# Altium PCB Aeroval-v2-PCB1-proto1.PcbDoc (part 2 of 2)
Units mm, origin at the board's own origin, x right, y up, seen from the top; angles counter-clockwise.
Board outline 100 x 100 mm, 6 copper layers (Top Layer, Internal Plane (GND), Signal Layer (VERT), Signal Layer 2 (HOR), Internal Plane (PWR), Bottom Layer), stack 1.231 mm thick; 208 components, 166 nets, 796 pads, 481 vias.
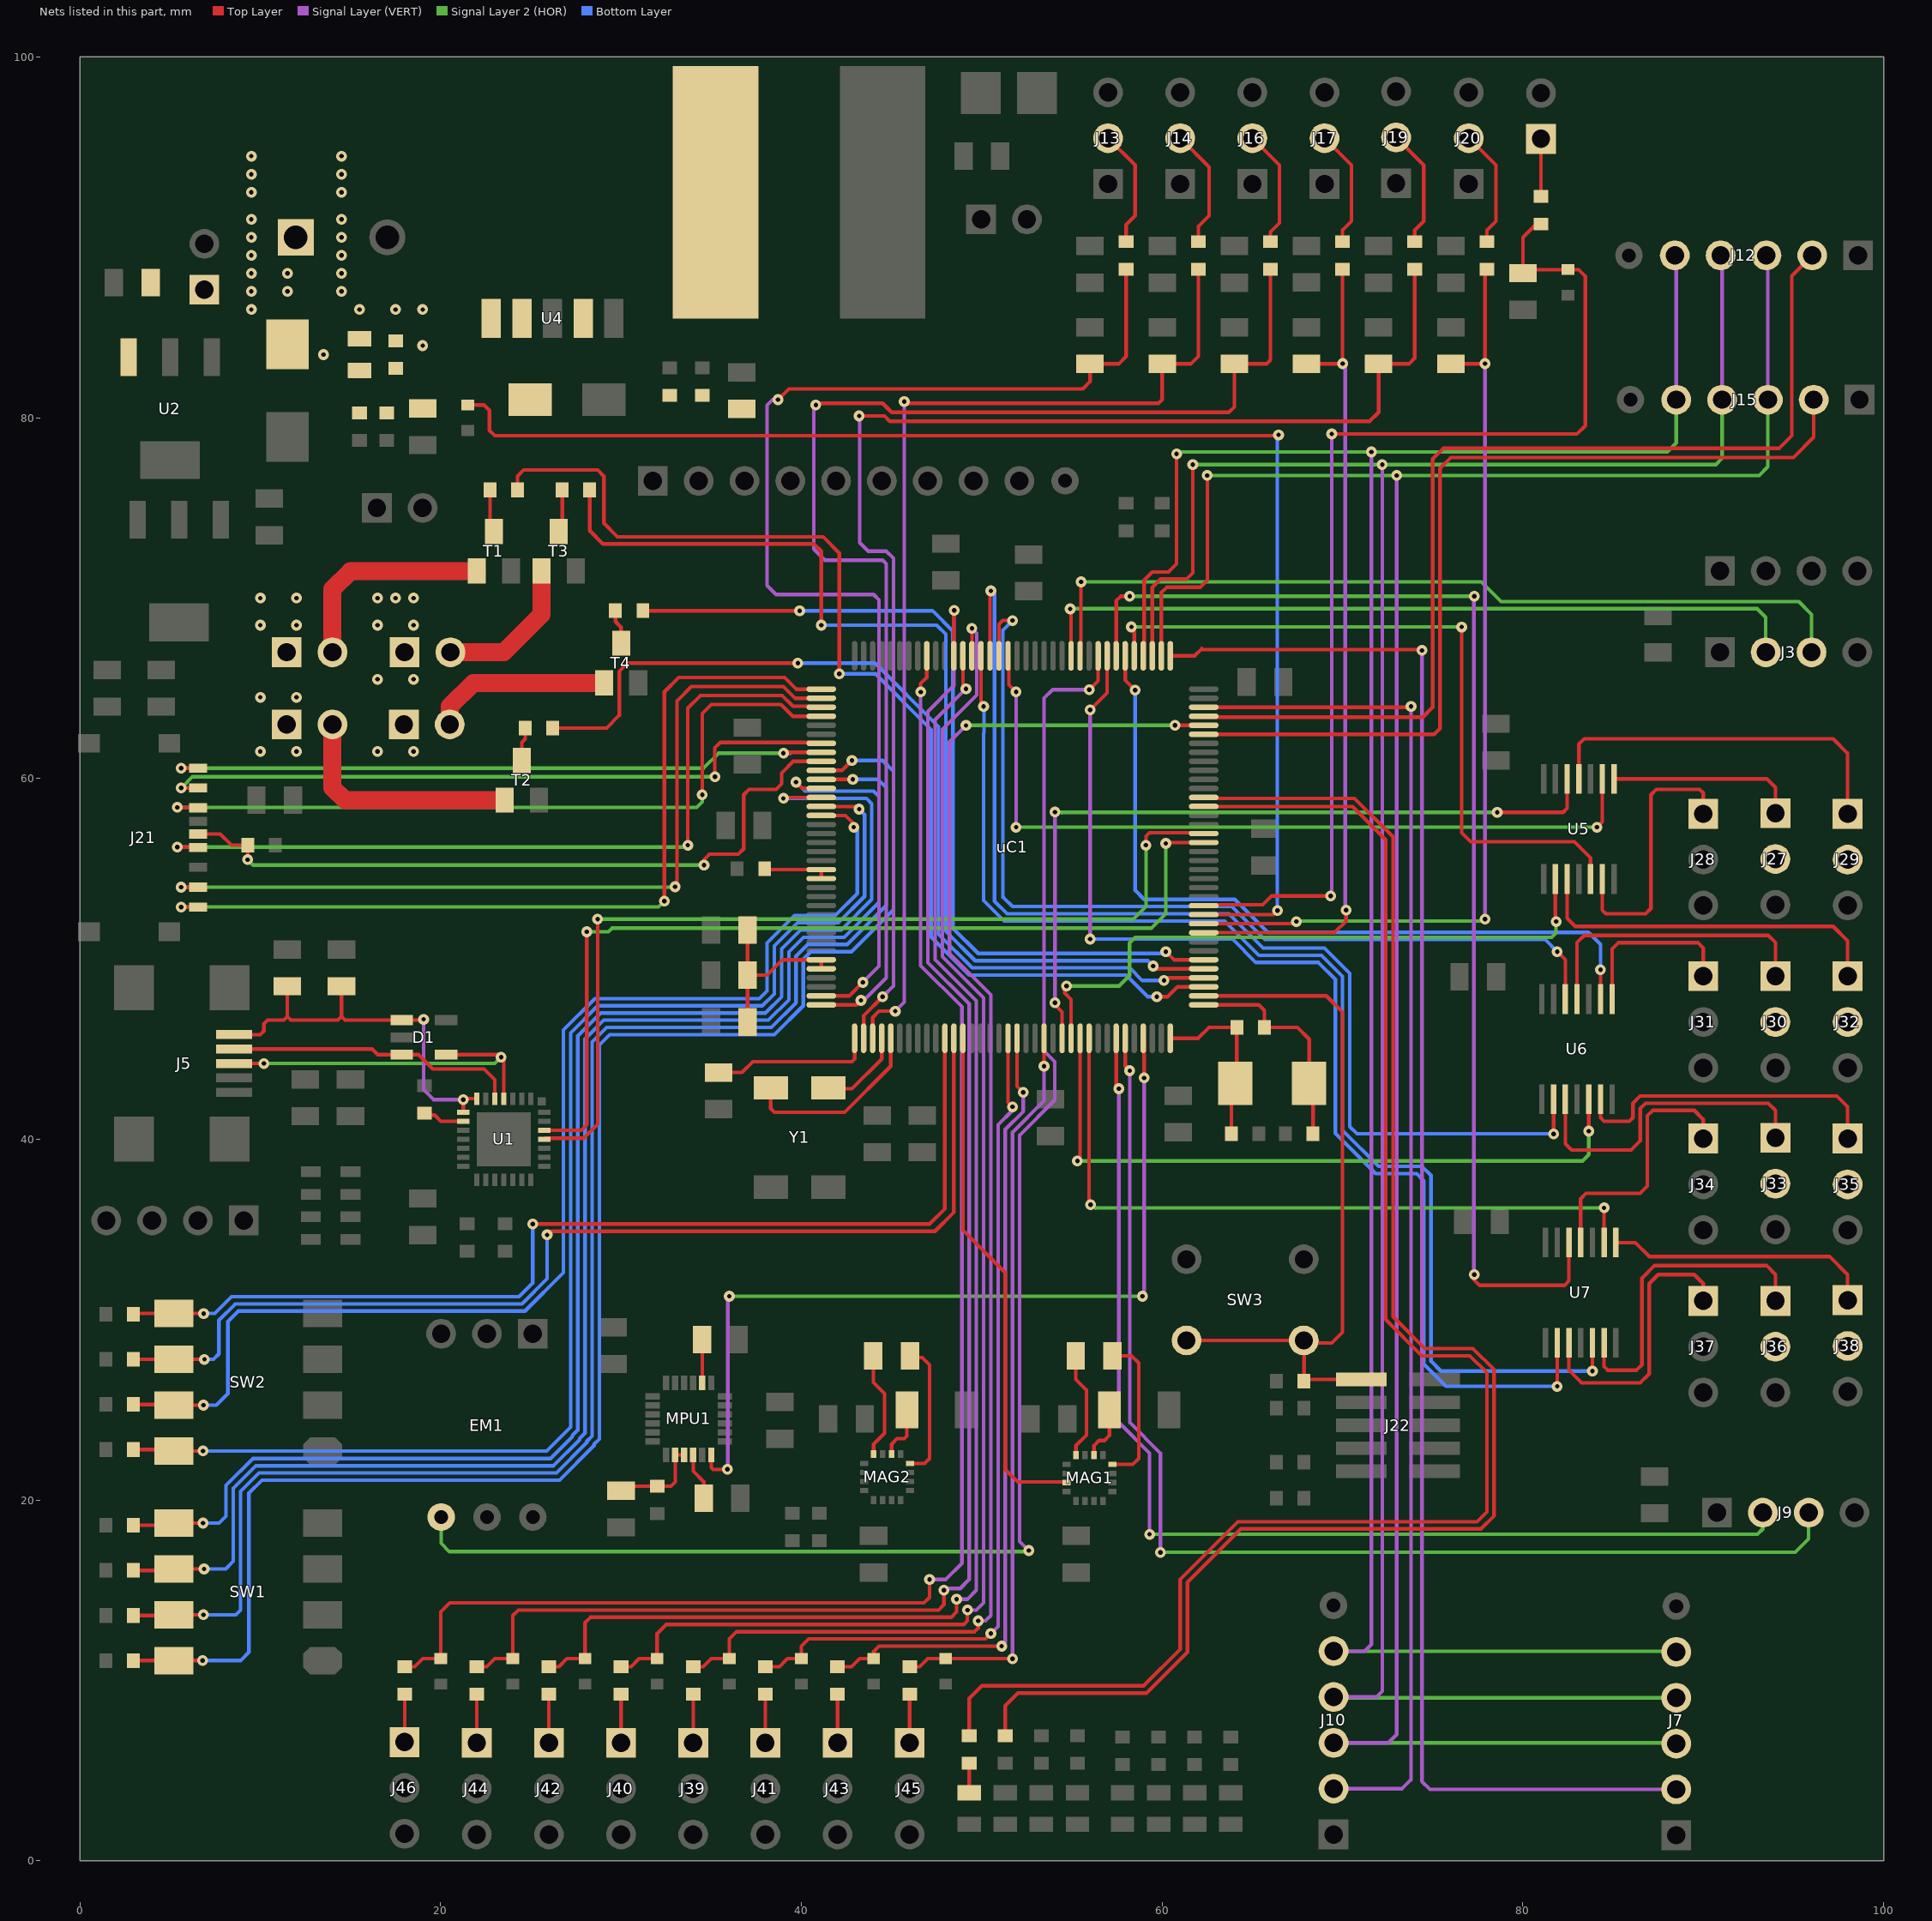
[diagram p6: the nets of this part, all layers, seen from the top]

## Via types
v1: diameter 0.6, hole 0.25, Top Layer to Bottom Layer, 475 vias
v2: diameter 6, hole 3, Top Layer to Bottom Layer, 4 vias
v3: diameter 1.2, hole 0.9, Top Layer to Bottom Layer, 2 vias

## Nets (pads, with @x,y where several pads share a name; then routed paths per layer and width w, separated by ;. In a path a pad name is that pad's centre, name@x,y a point inside that pad or via, vN(x,y) a via of type N, cw(c..) or ccw(c..) an arc to the next point about the centre after c; other vN are vias at no path point) (continued)
LED6_UC: R18.1 uC1.96 | length 88.3
  Top Layer w0.2: R18.1@51.3,6.924 51.3,8.6 52,9.3 59.137,9.3 61.4,11.563 61.4,15.434 64.366,18.4 77.666,18.4 78.4,19.134 78.4,27.224 77.224,28.4 74.566,28.4 72.8,30.166 72.8,56.766 70.666,58.9 62.35,58.9 uC1.96@62.3,58.95
LED7: D9.A R25.2 | length 1.6
  Top Layer w0.2: D9.A@49.3,3.775 R25.2@49.3,5.4
LED7_UC: R25.1 uC1.95 | length 89.3
  Top Layer w0.2: R25.1@49.3,6.924 49.3,9 50,9.7 58.972,9.7 61,11.728 61,15.6 64.2,18.8 77.464,18.8 78,19.336 78,27.059 77.059,28 74.4,28 72.4,30 72.4,56.6 70.55,58.45 uC1.95@62.3,58.45
NetC25_2: C25.2 R36.2 R37.1 U4.4
NetC33_1: C33.1 MPU1.8 MPU1.9 R64.1 | length 5.2
  Top Layer w0.2: C33.1@30,20.516 30.246,20.762 R64.1@32,20.762 32.762,20.762 33,21 MPU1.8@33,22.5 MPU1.9@33.5,22.5
NetC34_1: C34.1 MPU1.10 | length 2.6
  Top Layer w0.2: MPU1.10@34,22.5 34,21.6 34.584,21.016 C34.1@34.584,20.1
NetC35_1: C35.1 MPU1.20 | length 2.4
  Top Layer w0.2: C35.1@34.484,28.9 34.5,28.884 MPU1.20@34.5,26.5
NetC40_1: C40.1 MAG1.10 | length 3
  Top Layer w0.2: MAG1.10@56.222,22.5 56.222,23.022 56.5,23.3 56.8,23.3 57.071,23.571 C40.1@57.071,25
NetC42_1: C42.1 MAG1.12 | length 6
  Top Layer w0.2: C42.1@55.206,28 55.206,26.694 55.8,26.1 55.8,23.6 55.222,23.022 MAG1.12@55.222,22.5
NetC42_2: C42.2 MAG1.8 | length 8.5
  Top Layer w0.2: C42.2@57.238,28 58.3,28 58.7,27.6 58.7,22.3 58.375,21.975 MAG1.8@57.247,21.975
NetC44_1: C44.1 MAG2.10 | length 3
  Top Layer w0.2: MAG2.10@45,22.55 45,23.1 45.3,23.4 45.7,23.4 45.849,23.549 C44.1@45.849,25
NetC46_1: C46.1 MAG2.12 | length 6
  Top Layer w0.2: C46.1@43.984,28 43.984,26.516 44.6,25.9 44.6,23.7 44,23.1 MAG2.12@44,22.55
NetC46_2: C46.2 MAG2.8 | length 7.7
  Top Layer w0.2: C46.2@46.016,28 46.116,27.9 46.7,27.9 47.1,27.5 47.1,22.3 46.825,22.025 MAG2.8@46.025,22.025
NetC57_2: C57.2 C58.1 FB1.1 uC1.31 uC1.32 | length 10.1
  Top Layer w0.2: C58.1@37.016,46.5 C57.2@37.016,49.1 ; FB1.1@37.066,51.55 FB1.1@37.016,51.6 C57.2@37.016,49.1 ; uC1.32@41.1,49.45 uC1.31@41.1,49.95 38.95,49.95 38.1,49.1 C57.2@37.016,49.1
NetC59_1: C59.1 uC1.37 | length 9
  Top Layer w0.2: C59.1@35.4,43.7 36.7,43.7 37.3,44.3 42.8,44.3 42.95,44.45 uC1.37@42.95,45.6
NetC60_2: C60.2 R67.1 uC1.73 Y2.1 | length 12.5
  Top Layer w0.2: uC1.73@62.3,47.45 65.35,47.45 65.662,47.138 R67.1@65.662,46.2 67.5,46.2 68.15,45.55 68.15,43.3 68.362,43.088 C60.2@68.362,40.3
NetC61_2: C61.2 R67.2 uC1.72 Y2.2 | length 10
  Top Layer w0.2: uC1.72@60.45,45.6 61.994,45.6 62.594,46.2 R67.2@64.138,46.2 64.138,43.188 Y2.2@64.05,43.1 63.838,42.888 C61.2@63.838,40.3
NetD10_C: D10.C R34.2
NetD12_1: D12.1 L1.1 U4.2
NetD13_2: D13.2 R38.1 uC1.104 | length 82.5
  Top Layer w0.2: R38.1@34,10.762 34.552,10.762 35,11.21 D13.2@36,11.21 36,12.3 36.4,12.7 49.6,12.7 49.8,12.9 v1(49.8,13.3) ; v1(60.715,62.95) uC1.104@62.3,62.95
  Signal Layer (VERT) w0.2: v1(49.124,62.941) 48.209,62.027 48.209,50.291 50.5,48 50.5,25.943 50.5,23.057 50.5,13.6 50.2,13.3 v1(49.8,13.3)
  Signal Layer 2 (HOR) w0.2: v1(49.124,62.941) 49.132,62.95 v1(60.715,62.95)
  Bottom Layer w0.2: v1@49.022,62.941 v1(49.124,62.941)
NetD14_2: D14.2 R39.1 uC1.54 | length 47.3
  Top Layer w0.2: R39.1@38,10.762 38.776,10.762 39.224,11.21 D14.2@40,11.21 40,11.9 40.4,12.3 50.2,12.3 v1(50.5,12.6) ; uC1.54@51.45,45.6 51.45,42.05 v1(51.7,41.8)
  Signal Layer (VERT) w0.2: v1(50.5,12.6) 50.9,13 50.9,23.223 50.9,25.777 50.9,40.8 51.7,41.6 v1(51.7,41.8)
NetD15_2: D15.2 R40.1 uC1.55 | length 44.1
  Top Layer w0.2: R40.1@42,10.762 42.776,10.762 43.224,11.21 D15.2@44,11.21 44,11.6 44.3,11.9 v1(51.1,11.9) ; uC1.55@51.95,45.6 51.95,42.95 v1(52.3,42.6)
  Signal Layer (VERT) w0.2: v1(51.1,11.9) 51.3,12.1 51.3,40.3 51.3,40.551 52.3,41.551 v1(52.3,42.6)
NetD16_2: D16.2 R41.1 uC1.58 | length 41.1
  Top Layer w0.2: R41.1@46,10.762 46.552,10.762 47,11.21 D16.2@48,11.21 51.69,11.21 v1(51.7,11.2) ; v1(53.45,44.05) uC1.58@53.45,45.6 uC1.58@53.5,45.55
  Signal Layer (VERT) w0.2: v1(51.7,11.2) 51.7,11.8 51.7,40 51.7,40.386 53.45,42.136 v1(53.45,44.05)
NetD17_2: D17.2 R42.1 uC1.131 | length 80.1
  Top Layer w0.2: R42.1@30,10.762 30.552,10.762 31,11.21 D17.2@32,11.21 32,12.6 32.5,13.1 49,13.1 49.2,13.3 v1(49.2,13.9) ; uC1.131@49.45,66.8 v1(49.45,68.322)
  Signal Layer (VERT) w0.2: v1(49.2,13.9) 49.7,13.9 50.1,14.3 50.1,22.892 50.1,26.108 50.1,47.834 47.809,50.125 47.809,62.719 49.724,64.633 49.724,68.049 v1(49.45,68.322)
NetD18_2: D18.2 R43.1 uC1.132 | length 80.6
  Top Layer w0.2: R43.1@26,10.762 26.552,10.762 27,11.21 D18.2@28,11.21 28,13.2 28.3,13.5 48.3,13.5 48.6,13.8 v1(48.6,14.5) ; uC1.132@48.95,66.8 48.95,65.121 49.098,64.973 v1(49.124,64.973)
  Signal Layer (VERT) w0.2: v1(48.6,14.5) 49.2,14.5 49.7,15 49.7,22.726 49.7,26.274 49.7,47.669 47.409,49.96 47.409,63.259 v1(49.124,64.973)
NetD19_2: D19.2 R44.1 uC1.133 | length 89
  Top Layer w0.2: R44.1@22,10.762 22.552,10.762 23,11.21 D19.2@24,11.21 24,13.6 24.3,13.9 47.6,13.9 47.9,14.2 v1(47.9,15) ; uC1.133@48.45,66.8 48.45,69.303 v1(48.463,69.317)
  Signal Layer (VERT) w0.2: v1(47.9,15) 48,15.1 48.8,15.1 49.3,15.6 49.3,47.503 47.009,49.794 47.009,63.709 48.463,65.163 v1(48.463,69.317) v1@48.412,69.266
NetD20_2: D20.2 R45.1 uC1.136 | length 86.8
  Top Layer w0.2: R45.1@18,10.762 18.552,10.762 19,11.21 D20.2@20,11.21 20,13.8 20.5,14.3 46.8,14.3 47.1,14.6 v1(47.1,15.6) ; v1(46.609,64.795) 46.609,65.258 46.95,65.599 uC1.136@46.95,66.8
  Signal Layer (VERT) w0.2: v1(46.609,64.795) 46.609,49.628 48.9,47.337 48.9,16.5 48,15.6 v1(47.1,15.6)
NetEM1_4: EM1.4 uC1.117 | length 87.5
  Top Layer w0.2: v1(55.956,64.922) 56.45,65.416 uC1.117@56.45,66.8
  Signal Layer (VERT) w0.2: v1(52.6,17.2) 52.1,17.7 52.1,40.22 54.05,42.17 54.05,44.299 53.451,44.897 53.451,64.451 53.922,64.922 v1(55.956,64.922)
  Signal Layer 2 (HOR) w0.2: EM1.4@20.025,19.057 20.025,17.6 20.487,17.138 52.538,17.138 v1(52.6,17.2)
NetJ27_1: J27.1 U5.8 | length 10.6
  Top Layer w0.2: U5.8@85.05,59.975 93.525,59.975 94,59.5 J27.1@94,58.08
NetJ28_1: J28.1 U5.6 | length 15.2
  Top Layer w0.2: U5.6@84.4,54.425 84.4,52.7 84.6,52.5 86.8,52.5 87.1,52.8 87.1,59.1 87.4,59.4 89.8,59.4 90,59.2 J28.1@90,58.04
NetJ29_1: J29.1 U5.11 | length 20.6
  Top Layer w0.2: U5.11@83.1,59.975 83.1,61.9 83.4,62.2 97.2,62.2 98,61.4 J29.1@98,58.04
NetJ30_1: J30.1 U6.11 | length 16.3
  Top Layer w0.2: U6.11@83,47.775 83,50.9 83.4,51.3 93.6,51.3 94,50.9 J30.1@94,49.04
NetJ31_1: J31.1 U6.8 | length 9.7
  Top Layer w0.2: U6.8@84.95,47.775 84.95,50.55 85.3,50.9 89.7,50.9 90,50.6 J31.1@90,49.04
NetJ32_1: J32.1 U5.3 | length 20.2
  Top Layer w0.2: U5.3@82.45,54.425 82.45,52.25 82.9,51.8 97.2,51.8 98,51 J32.1@98,49.04
NetJ33_1: J33.1 U6.3 | length 18.1
  Top Layer w0.2: U6.3@82.35,42.225 82.35,39.75 82.7,39.4 86,39.4 86.5,39.9 86.5,41.7 86.8,42 93.6,42 94,41.6 J33.1@94,40.08
NetJ34_1: J34.1 U7.11 | length 14.8
  Top Layer w0.2: U7.11@83.2,34.275 83.2,36.7 83.5,37 86.5,37 86.9,37.4 86.9,41.3 87.2,41.6 89.5,41.6 90,41.1 J34.1@90,40.04
NetJ35_1: J35.1 U6.6 | length 17.9
  Top Layer w0.2: U6.6@84.3,42.225 84.3,41.2 84.5,41 85.9,41 86.1,41.2 86.1,42 86.5,42.4 97.4,42.4 98,41.8 J35.1@98,40.04
NetJ36_1: J36.1 U7.6 | length 17.8
  Top Layer w0.2: U7.6@84.5,28.725 84.5,27.4 84.7,27.2 86.3,27.2 86.6,27.5 86.6,32.3 87.3,33 93.5,33 94,32.5 J36.1@94,31.04
NetJ37_1: J37.1 U7.3 | length 15.8
  Top Layer w0.2: U7.3@82.55,28.725 82.55,27.2 83.25,26.5 86.5,26.5 87,27 87,32 87.5,32.5 89.5,32.5 90,32 J37.1@90,31.04
NetJ38_1: J38.1 U7.8 | length 15
  Top Layer w0.2: U7.8@85.15,34.275 86.225,34.275 87,33.5 97,33.5 98,32.5 J38.1@98,31.08
NetJ39_1: J39.1 R38.2 | length 2.7
  Top Layer w0.2: J39.1@34,6.54 R38.2@34,9.238
NetJ40_1: J40.1 R42.2 | length 2.7
  Top Layer w0.2: J40.1@30,6.54 R42.2@30,9.238
NetJ41_1: J41.1 R39.2 | length 2.7
  Top Layer w0.2: J41.1@38,6.54 R39.2@38,9.238
NetJ42_1: J42.1 R43.2 | length 2.7
  Top Layer w0.2: J42.1@26,6.54 R43.2@26,9.238
NetJ43_1: J43.1 R40.2 | length 2.7
  Top Layer w0.2: J43.1@42,6.54 R40.2@42,9.238
NetJ44_1: J44.1 R44.2 | length 2.7
  Top Layer w0.2: J44.1@22,6.54 R44.2@22,9.238
NetJ45_1: J45.1 R41.2 | length 2.7
  Top Layer w0.2: J45.1@46,6.54 R41.2@46,9.238
NetJ46_1: J46.1 R45.2 | length 2.7
  Top Layer w0.2: J46.1@18,6.58 R45.2@18,9.238
NetJ47_1: J47.1 R65.1 | length 3.2
  Top Layer w0.2: R65.1@81,92.262 J47.1@81,95.46
NetMAG1_15: MAG1.15 uC1.49 | length 28.6
  Top Layer w0.2: uC1.49@48.95,45.6 48.95,34.95 51.3,32.6 51.3,21.7 52,21 54.697,21 MAG1.15@54.697,20.975
NetMPU1_12: MPU1.12 uC1.69 | length 48.5
  Top Layer w0.2: MPU1.12@35,22.5 35,21.8 35.1,21.7 v1(35.9,21.7) ; uC1.69@58.95,45.6 59,45.55 v1(59,43.4)
  Signal Layer (VERT) w0.2: v1(35.9,21.7) 35.916,21.716 35.916,31.216 v1(36,31.3) ; v1(58.9,31.3) 59,31.4 v1(59,43.4)
  Signal Layer 2 (HOR) w0.2: v1(36,31.3) v1(58.9,31.3)
NetR1_1: R1.1 uC1.75 | length 63.8
  Top Layer w0.2: R1.1@24.262,76 24.262,76.762 24.6,77.1 28.7,77.1 29.05,76.75 29.05,74.15 29.8,73.4 41.2,73.4 42.1,72.5 42.1,65.6 v1(42.1,65.8) ; v1(59.7,47.9) 60.3,47.9 60.85,48.45 uC1.75@62.3,48.45
  Bottom Layer w0.2: v1(42.1,65.8) 44.105,65.8 47.2,62.705 47.2,51.203 49.303,49.1 58,49.1 59.2,47.9 v1(59.7,47.9)
NetR2_1: R2.1 U1.9 | length 2.4
  Top Layer w0.2: R2.1@19,41.338 19.662,41.338 20,41 U1.9@21.25,41
NetR3_1: R3.1 uC1.76 | length 53.1
  Top Layer w0.2: R3.1@26.212,62.8 29.2,62.8 29.9,63.5 29.9,65.924 30.376,66.4 v1(39.8,66.4) ; v1(60.1,48.8) 60.25,48.95 uC1.76@62.3,48.95
  Bottom Layer w0.2: v1(39.8,66.4) 44.071,66.4 47.6,62.871 47.6,51.369 49.469,49.5 58.2,49.5 58.9,48.8 v1(60.1,48.8)
NetR4_1: R4.1 uC1.77 | length 58.4
  Top Layer w0.2: R4.1@28.262,76 28.262,73.738 29,73 40.7,73 41.1,72.6 v1(41.1,68.5) ; v1(59.5,49.6) 59.65,49.45 uC1.77@62.3,49.45
  Bottom Layer w0.2: v1(41.1,68.5) 47.495,68.5 48,67.995 48,51.534 49.634,49.9 59.2,49.9 v1(59.5,49.6)
NetR5_1: R5.1 uC1.78 | length 48.8
  Top Layer w0.2: R5.1@31.212,69.3 v1(39.9,69.3) ; v1(60.2,50.4) 60.65,49.95 uC1.78@62.3,49.95
  Bottom Layer w0.2: v1(39.9,69.3) 47.261,69.3 48.4,68.161 48.4,51.7 49.8,50.3 60.1,50.3 v1(60.2,50.4)
NetR66_2: R66.2 uC1.21 uC1.22 | length 3.7
  Top Layer w0.2: R66.2@37.962,55 38.012,54.95 uC1.21@41.1,54.95 uC1.22@41.1,54.45
NetuC1_40: uC1.40 Y1.4 | length 4.8
  Top Layer w0.2: Y1.4@41.5,42.85 41.55,42.8 42.8,42.8 44.45,44.45 uC1.40@44.45,45.6
NetuC1_41: uC1.41 Y1.1 | length 10.9
  Top Layer w0.2: Y1.1@38.2,43.15 38.4,42.95 Y1.1@38.3,42.85 38.3,41.7 38.5,41.5 42.4,41.5 44.95,44.05 uC1.41@44.95,45.6
PWM_O_0_UC: U5.9 uC1.127 | length 44.7
  Top Layer w0.2: uC1.127@51.45,66.8 51.5,66.75 51.5,65.2 v1(51.9,64.8) ; v1(84.1,57.3) 84.4,57.6 U5.9@84.4,59.975
  Signal Layer (VERT) w0.2: v1(51.9,57.3) v1(51.9,64.8)
  Signal Layer 2 (HOR) w0.2: v1(51.9,57.3) v1(84.1,57.3)
PWM_O_1_UC: U6.12 uC1.128 | length 53
  Top Layer w0.2: uC1.128@50.95,66.8 50.95,68.55 51.156,68.756 v1(51.7,68.756) ; v1(81.9,50.4) 82.35,49.95 U6.12@82.35,47.775
  Bottom Layer w0.2: v1(51.7,68.756) 51.166,68.222 51.166,53.4 51.2,53.4 51.7,52.9 63.866,52.9 65.696,51.07 81.23,51.07 v1(81.9,50.4)
PWM_O_2_UC: U6.2 uC1.129 | length 64.2
  Top Layer w0.2: uC1.129@50.45,66.8 50.45,70.35 v1(50.5,70.4) ; v1(81.7,40.3) U6.2@81.7,42.225
  Bottom Layer w0.2: v1(50.5,70.4) 50.7,70.2 50.7,53.2 51.4,52.5 63.7,52.5 65.6,50.6 69,50.6 70.4,49.2 70.4,40.7 70.8,40.3 v1(81.7,40.3)
PWM_O_3_UC: U7.5 uC1.130 | length 70.9
  Top Layer w0.2: uC1.130@49.95,66.8 49.95,64.15 v1(50.1,64) ; v1(83.85,27.15) U7.5@83.85,28.725
  Signal Layer (VERT) w0.2: v1@50,64 v1(50.1,64)
  Bottom Layer w0.2: v1(50.1,64) 50.124,63.976 50.124,62.527 50.1,62.503 50.1,53.234 51.234,52.1 63.466,52.1 65.366,50.2 68.834,50.2 70,49.034 70,40.5 72,38.5 74.4,38.5 74.9,38 74.9,27.7 75.45,27.15 v1(83.85,27.15)
PWM_O_4_UC: U5.5 uC1.113 | length 40.3
  Top Layer w0.2: v1(58.293,68.402) 58.293,68.351 58.45,68.194 uC1.113@58.45,66.8 ; v1(76.6,68.4) 76.6,56.99 77.1,56.49 82.855,56.49 83.75,55.594 U5.5@83.75,54.425
  Signal Layer 2 (HOR) w0.2: v1(58.293,68.402) v1@76.6,68.402
PWM_O_5_UC: U6.9 uC1.114 | length 43.3
  Top Layer w0.2: uC1.114@57.95,66.8 57.95,65.45 v1(58.5,64.9) ; U6.9@84.3,47.775 v1(84.3,49.4)
  Bottom Layer w0.2: v1(58.5,64.9) 58.5,53.8 59,53.3 64.031,53.3 65.861,51.47 83.63,51.47 84.3,50.8 v1(84.3,49.4)
PWM_O_6_UC: U7.12 uC1.115 | length 69.1
  Top Layer w0.2: uC1.115@57.45,66.8 57.45,69.85 57.7,70.1 v1(58.2,70.1) ; v1(77.3,32.5) 77.3,32.2 77.6,31.9 82.3,31.9 82.55,32.15 U7.12@82.55,34.275
  Signal Layer (VERT) w0.2: v1(77.3,32.5) 77.284,32.516 77.284,70.084 v1(77.3,70.1)
  Signal Layer 2 (HOR) w0.2: v1(58.2,70.1) 57.9,70.1 v1(77.3,70.1)
PWM_O_7_UC: U7.2 uC1.116 | length 65.4
  Top Layer w0.2: v1(56,63.8) 56.95,64.75 uC1.116@56.95,66.8 ; v1(81.9,26.3) U7.2@81.9,28.725
  Signal Layer (VERT) w0.2: v1@56,51.3 v1(56,63.8)
  Bottom Layer w0.2: v1(56,51.1) 63.9,51.1 65.2,49.8 68.669,49.8 69.6,48.869 69.6,40.334 71.834,38.1 74.1,38.1 74.5,37.7 74.5,27.534 75.734,26.3 v1(81.9,26.3)
PWM_O_8_UC: U5.12 uC1.60 | length 42.9
  Top Layer w0.2: v1(54.051,47.574) 54.051,47.457 54.45,47.059 uC1.60@54.45,45.6 ; v1(78.577,58.123) 82.223,58.123 82.45,58.35 U5.12@82.45,59.975
  Signal Layer (VERT) w0.2: v1(54.051,47.574) v1(54.051,58.141)
  Signal Layer 2 (HOR) w0.2: v1(54.051,58.141) 54.381,58.141 54.422,58.1 54.445,58.123 v1(78.577,58.123)
PWM_O_9_UC: U5.2 uC1.61 | length 35.5
  Top Layer w0.2: v1(54.7,48.5) 54.6,48.4 54.6,48.1 54.95,47.75 uC1.61@54.95,45.6 ; U5.2@81.8,54.425 81.8,52.109 v1(81.839,52.07)
  Signal Layer 2 (HOR) w0.2: v1(54.7,48.5) 57.619,48.5 58.191,49.073 58.191,50.891 58.5,51.2 81.6,51.2 81.839,51.439 v1(81.839,52.07)
PWM_O_10_UC: U6.5 uC1.62 | length 38.6
  Top Layer w0.2: v1(55.3,38.8) 55.45,38.95 uC1.62@55.45,45.6 ; v1(83.65,40.45) U6.5@83.65,42.225
  Signal Layer (VERT) w0.2: v1@55.3,38.6 v1(55.3,38.8)
  Signal Layer 2 (HOR) w0.2: v1(55.3,38.8) 83.3,38.8 83.65,39.15 v1(83.65,40.45)
PWM_O_11_UC: U7.9 uC1.63 | length 39.9
  Top Layer w0.2: uC1.63@55.95,45.6 55.95,36.45 v1(56.025,36.375) ; U7.9@84.5,34.275 v1(84.5,36.2)
  Signal Layer 2 (HOR) w0.2: v1(56.025,36.375) 56.025,36.475 56.316,36.184 56.332,36.2 78.451,36.2 78.467,36.184 78.965,36.184 78.981,36.2 v1(84.5,36.2)
RESET_B: J22.10 R29.1 SW3.A uC1.74 | length 40.2
  Top Layer w0.2: SW3.A@61.35,28.85 SW3.A@67.85,28.85 67.862,28.838 SW3.A@67.862,28.7 ; uC1.74@62.3,47.95 69.1,47.95 70,47.05 70,29.3 69.4,28.7 SW3.A@67.862,28.7 ; J22.10@71.036,26.68 67.942,26.68 R29.1@67.862,26.6 SW3.A@67.862,28.7
S0: J13.2 R9.1 | length 6.6
  Top Layer w0.2: J13.2@57,95.5 58.5,94 58.5,91.2 58,90.7 R9.1@58,89.762
S0_UC: C7.1 R9.2 uC1.35 | length 67.1
  Top Layer w0.2: v1(38.7,81) 39.3,81.6 55.6,81.6 56,82 C7.1@56,82.984 57.584,82.984 58,83.4 R9.2@58,88.238 ; uC1.35@41.1,47.95 42.65,47.95 v1(43.4,48.7)
  Signal Layer (VERT) w0.2: v1(38.7,81) 38.4,81 38.1,80.7 38.1,70.7 38.6,70.2 44,70.2 44.3,69.9 44.3,49.6 v1(43.4,48.7)
S1: J16.2 R19.1 | length 6.6
  Top Layer w0.2: J16.2@65,95.5 66.5,94 66.5,90.8 66,90.3 R19.1@66,89.762
S1_UC: C11.1 R19.2 uC1.36 | length 72.6
  Top Layer w0.2: v1(40.8,80.7) 40.9,80.8 44.5,80.8 45,80.3 63.7,80.3 64,80.6 C11.1@64,82.984 65.784,82.984 66,83.2 R19.2@66,88.238 ; uC1.36@41.1,47.45 43.05,47.45 v1(43.3,47.7)
  Signal Layer (VERT) w0.2: v1(40.8,80.7) 40.683,80.583 40.683,72.717 41.3,72.1 44.5,72.1 44.7,71.9 44.7,48.949 43.451,47.7 v1(43.3,47.7)
S2: J19.2 R26.1 | length 6.6
  Top Layer w0.2: J19.2@72.968,95.54 74.5,94.008 74.5,90.9 74,90.4 R26.1@74,89.762
S2_UC: C16.1 R26.2 uC1.38 | length 75.4
  Top Layer w0.2: v1(43.2,80.1) 44.6,80.1 44.9,79.8 71.5,79.8 72,80.3 C16.1@72,82.984 73.684,82.984 74,83.3 R26.2@74,88.238 ; uC1.38@43.45,45.6 43.45,46.85 v1(44.5,47.9)
  Signal Layer (VERT) w0.2: v1(43.2,80.1) 43.223,80.077 43.223,73.077 43.7,72.6 44.7,72.6 45.1,72.2 45.1,48.5 v1(44.5,47.9)
S3: J14.2 R10.1 | length 6.6
  Top Layer w0.2: J14.2@61,95.5 62.6,93.9 62.6,91.2 62,90.6 R10.1@62,89.762
S3_UC: C8.1 R10.2 uC1.39 | length 60
  Top Layer w0.2: uC1.39@43.95,45.6 43.95,46.75 44.3,47.1 v1(45.2,47.1) ; v1(45.7,80.9) 45.8,80.8 59.8,80.8 60,81 C8.1@60,82.984 61.584,82.984 62,83.4 R10.2@62,88.238
  Signal Layer (VERT) w0.2: v1(45.2,47.1) 45.7,47.6 v1(45.7,80.9)
S4: J17.2 R20.1 | length 6.6
  Top Layer w0.2: J17.2@69,95.5 70.5,94 70.5,90.9 70,90.4 R20.1@70,89.762
S4_UC: C12.1 R20.2 uC1.81 | length 46.2
  Top Layer w0.2: uC1.81@62.3,51.45 69.55,51.45 70.2,52.1 v1(70.2,52.7) ; C12.1@68,82.984 v1@69.784,82.984 ; v1(70,83) R20.2@70,88.238
  Signal Layer (VERT) w0.2: v1(70,83) 70.145,82.855 v1@70.145,52.7
S5: J20.2 R27.1 | length 6.6
  Top Layer w0.2: J20.2@77,95.5 78.5,94 78.5,90.9 78,90.4 R27.1@78,89.762
S5_UC: C17.1 R27.2 uC1.82 | length 53.7
  Top Layer w0.2: uC1.82@62.3,51.95 67.317,51.95 v1(67.437,52.07) ; C17.1@76,82.984 77.884,82.984 v1(77.9,83) 77.9,88.138 R27.2@78,88.238
  Signal Layer (VERT) w0.2: v1(77.9,52.2) v1(77.9,83)
  Signal Layer 2 (HOR) w0.2: v1(67.437,52.07) 67.467,52.1 77.8,52.1 v1(77.9,52.2)
SD_DETECT: J21.G1 R28.2 uC1.9 | length 40.5
  Top Layer w0.2: J21.G1@6.55,56.925 7.775,56.925 8.4,56.3 R28.2@9.3,56.3 v1(9.3,55.5) ; v1(34.6,55.2) 34.6,55.5 34.9,55.8 36.5,55.8 36.8,56.1 36.8,59.1 37.1,59.4 38.6,59.4 38.9,59.7 38.9,60.3 39.55,60.95 uC1.9@41.1,60.95
  Signal Layer 2 (HOR) w0.2: v1(9.3,55.5) 9.6,55.2 v1(34.6,55.2)
  Bottom Layer w0.2: v1@34.5,55.2 v1(34.6,55.2)
SDHC0: J21.P7 uC1.2 | length 47.3
  Top Layer w0.2: v1(5.615,53.975) J21.P7@6.55,53.975 ; v1(33,54) 33.1,54.1 33.1,64.3 33.9,65.1 38.997,65.1 39.647,64.45 uC1.2@41.1,64.45
  Signal Layer 2 (HOR) w0.2: v1(5.615,53.975) 33,53.975 v1(33,54)
SDHC1: J21.P8 uC1.1 | length 48.8
  Top Layer w0.2: v1(5.615,52.875) J21.P8@6.55,52.875 ; v1(32.4,53.2) 32.4,64.8 33.2,65.6 39.063,65.6 39.713,64.95 uC1.1@41.1,64.95
  Signal Layer 2 (HOR) w0.2: v1(5.615,52.875) 32.075,52.875 v1(32.4,53.2)
SDHC2: J21.P1 uC1.8 | length 37.2
  Top Layer w0.2: v1(5.615,60.575) J21.P1@6.55,60.575 ; v1(39,61.4) 39.05,61.45 uC1.8@41.1,61.45
  Signal Layer (VERT) w0.2: v1(39,61.4) 39.4,61.4
  Signal Layer 2 (HOR) w0.2: v1(5.615,60.575) 34.575,60.575 35.4,61.4 v1(39,61.4)
SDHC3: J21.P2 uC1.7 | length 38.8
  Top Layer w0.2: v1(5.615,59.475) J21.P2@6.55,59.475 ; v1(35.2,60.1) 35.2,61.7 35.5,62 41.1,62 uC1.7@41.1,61.95
  Signal Layer 2 (HOR) w0.2: v1(5.615,59.475) 6.24,60.1 v1(35.2,60.1)
  Bottom Layer w0.2: v1@34.9,60.1 v1(35.2,60.1)
SDHC_CMD: J21.P3 uC1.4 | length 42.4
  Top Layer w0.2: v1(5.4,58.4) 6.525,58.4 J21.P3@6.55,58.375 ; v1(34.5,59.1) 34.5,63.6 35,64.1 38.866,64.1 39.516,63.45 uC1.4@41.1,63.45
  Signal Layer 2 (HOR) w0.2: v1(5.4,58.4) 34.2,58.4 34.5,58.7 v1(34.5,59.1)
SDHC_DCLK: J21.P5 uC1.3 | length 44.8
  Top Layer w0.2: v1(5.4,56.2) 6.525,56.2 J21.P5@6.55,56.175 ; v1(33.7,56.3) 33.7,63.9 34.4,64.6 38.931,64.6 39.531,64 41.05,64 uC1.3@41.1,63.95
  Signal Layer 2 (HOR) w0.2: v1(5.4,56.2) v1@33.45,56.2
SPI0_PCS0: J7.2 uC1.109 | length 91.1
  Top Layer w0.2: uC1.109@60.45,66.8 61.8,66.8 62.2,67.2 62.25,67.15 74.35,67.15 v1(74.4,67.1)
  Signal Layer (VERT) w0.2: v1(74.4,67.1) 74.4,4.4 74.84,3.96 J7.2@88.5,3.96
SPI0_PCS1: J10.2 uC1.106 | length 75.5
  Top Layer w0.2: uC1.106@62.3,63.95 73.75,63.95 v1(73.8,64)
  Signal Layer (VERT) w0.2: J10.2@69.5,4 73.3,4 73.8,4.5 v1(73.8,64)
SPI0_PCS2: J12.2 uC1.105 | length 57.6
  Top Layer w0.2: uC1.105@62.3,63.45 62.35,63.4 74.45,63.4 75,63.95 75,77.718 75.582,78.3 94.2,78.3 94.9,79 94.9,87.86 J12.2@96.04,89
SPI0_PCS4: J15.2 uC1.103 | length 51.2
  Top Layer w0.2: uC1.103@62.3,62.45 75.082,62.45 75.4,62.768 75.4,77.2 76,77.8 95,77.8 96.12,78.92 J15.2@96.12,81
SPI0_SCK: J7.3 J10.3 J12.3 J15.3 uC1.110 | length 147.7
  Top Layer w0.2: uC1.110@59.95,66.8 59.95,70.3 60.25,70.6 62.1,70.6 62.5,71 v1(62.5,76.8)
  Signal Layer (VERT) w0.2: J10.3@69.5,6.54 72.54,6.54 73,7 v1(73,76.8) ; J12.3@93.5,89 93.58,88.92 J15.3@93.58,81
  Signal Layer 2 (HOR) w0.2: v1(62.5,76.8) v1(73,76.8) 93.1,76.8 93.58,77.28 J15.3@93.58,81 ; J10.3@69.5,6.54 88.46,6.54 J7.3@88.5,6.5
SPI0_SIN: J7.5 J10.5 J12.5 J15.5 uC1.112 | length 138.3
  Top Layer w0.2: uC1.112@58.95,66.8 59,66.85 59,71 59.45,71.45 60.35,71.45 60.8,71.9 v1(60.8,78)
  Signal Layer (VERT) w0.2: J10.5@69.5,11.62 71.22,11.62 71.6,12 v1(71.6,78.1) ; J12.5@88.42,89 88.5,88.92 J15.5@88.5,81
  Signal Layer 2 (HOR) w0.2: v1(60.8,78) 60.9,78.1 71.4,78.1 71.5,78 v1(71.6,78.1) 88,78.1 88.5,78.6 J15.5@88.5,81 ; J10.5@69.5,11.62 88.46,11.62 J7.5@88.5,11.58
SPI0_SOUT: J7.4 J10.4 J12.4 J15.4 uC1.111 | length 142.9
  Top Layer w0.2: uC1.111@59.45,66.8 59.45,70.6 59.9,71.05 61.35,71.05 61.7,71.4 v1(61.7,77.4)
  Signal Layer (VERT) w0.2: J10.4@69.5,9.08 71.88,9.08 72.2,9.4 v1(72.2,77.4) ; J12.4@90.96,89 91.04,88.92 J15.4@91.04,81
  Signal Layer 2 (HOR) w0.2: v1(61.7,77.4) 72,77.4 v1@72.1,77.5 ; J10.4@69.5,9.08 69.54,9.04 J7.4@88.5,9.04 ; v1(72.2,77.4) 72.6,77.4 90.7,77.4 91.04,77.74 J15.4@91.04,81
SW0: R14.2 SW1.8 uC1.10 | length 91
  Top Layer w0.2: R14.2@2.962,11.1 SW1.8@5.2,11.1 v1(6.8,11.1) ; uC1.10@41.1,60.45 42.25,60.45 v1(42.8,61)
  Bottom Layer w0.2: v1(6.8,11.1) 8.9,11.1 9.366,11.566 9.366,20.381 10.085,21.1 26.583,21.1 28.5,23.017 28.5,23.088 28.8,23.388 28.8,45.225 29.375,45.8 38.5,45.8 40.1,47.4 40.1,49.984 40.516,50.4 42.771,50.4 45.1,52.729 45.1,60.4 44.5,61 v1(42.8,61)
SW1: R13.2 SW1.7 uC1.11 | length 86.6
  Top Layer w0.2: R13.2@2.962,13.6 5.16,13.6 SW1.7@5.2,13.64 v1(6.84,13.64) ; uC1.11@41.1,59.95 v1(42.85,59.95)
  Bottom Layer w0.2: v1(6.84,13.64) 8.64,13.64 8.9,13.9 8.9,20.481 9.919,21.5 26.417,21.5 28.1,23.183 28.1,23.254 28.4,23.554 28.4,45.391 29.209,46.2 38.334,46.2 39.7,47.566 39.7,50.149 40.351,50.8 42.534,50.8 44.7,52.966 44.7,59.5 44.25,59.95 v1(42.85,59.95)
SW2: R12.2 SW1.6 uC1.12 | length 85.8
  Top Layer w0.2: R12.2@2.962,16.1 5.12,16.1 SW1.6@5.2,16.18 v1(6.88,16.18) ; v1(39.7,59.8) 40.05,59.45 uC1.12@41.1,59.45
  Bottom Layer w0.2: v1(6.88,16.18) 8.08,16.18 8.5,16.6 8.5,20.646 9.754,21.9 26.251,21.9 27.7,23.349 27.7,23.419 28,23.719 28,45.557 29.043,46.6 38.169,46.6 39.3,47.731 39.3,50.386 40.114,51.2 42.369,51.2 44.3,53.131 44.3,59 44,59.3 40.2,59.3 v1(39.7,59.8)
SW3: R11.2 SW1.5 uC1.13 | length 83.1
  Top Layer w0.2: R11.2@2.962,18.6 5.08,18.6 SW1.5@5.2,18.72 v1(6.82,18.72) ; v1(39,58.9) 39.05,58.95 uC1.13@41.1,58.95
  Bottom Layer w0.2: v1(6.82,18.72) 7.72,18.72 8.1,19.1 8.1,20.812 9.588,22.3 26.086,22.3 27.3,23.514 27.3,23.585 27.6,23.885 27.6,45.722 28.878,47 38.003,47 38.9,47.897 38.9,50.551 39.949,51.6 42.203,51.6 43.9,53.297 43.9,58.6 43.6,58.9 43.1,58.9 40.9,58.9 v1(39,58.9)
SW4: R24.2 SW2.8 uC1.14 | length 74.8
  Top Layer w0.2: R24.2@2.962,22.8 5.12,22.8 SW2.8@5.2,22.72 v1(6.82,22.72) ; uC1.14@41.1,58.45 43.05,58.45 v1(43.2,58.3)
  Bottom Layer w0.2: v1(6.82,22.72) 25.869,22.72 27.2,24.051 27.2,45.888 28.712,47.4 37.837,47.4 38.5,48.063 38.5,50.717 39.783,52 42.037,52 43.5,53.463 43.5,58 v1(43.2,58.3)
SW5: R23.2 SW2.7 uC1.15 | length 69.6
  Top Layer w0.2: R23.2@2.962,25.3 5.16,25.3 SW2.7@5.2,25.26 v1(6.84,25.26) ; uC1.15@41.1,57.95 42.45,57.95 42.9,57.5 v1(42.9,57.3)
  Bottom Layer w0.2: v1(6.84,25.26) 7.56,25.26 8.2,25.9 8.2,29.9 8.775,30.475 24.675,30.475 26.8,32.6 26.8,46.054 28.546,47.8 37.672,47.8 38.1,48.228 38.1,50.883 39.617,52.4 41.872,52.4 43.1,53.628 43.1,57.1 v1(42.9,57.3)
SW6: R22.2 SW2.6 uC1.48 | length 61
  Top Layer w0.2: R22.2@2.962,27.8 SW2.6@5.2,27.8 v1(6.9,27.8) ; v1(25.9,34.7) 26.1,34.9 47.4,34.9 48.45,35.95 uC1.48@48.45,45.6
  Bottom Layer w0.2: v1(6.9,27.8) 7.4,27.8 7.7,28.1 7.7,29.966 8.61,30.875 24.51,30.875 25.9,32.266 v1(25.9,34.7)
SW7: R21.2 SW2.5 uC1.47 | length 58.8
  Top Layer w0.2: R21.2@2.962,30.3 3.002,30.34 SW2.5@5.2,30.34 v1(6.86,30.34) ; v1(25.1,35.3) 47.1,35.3 47.95,36.15 uC1.47@47.95,45.6
  Bottom Layer w0.2: v1(6.86,30.34) 7.469,30.34 8.404,31.275 24.344,31.275 25.1,32.031 v1(25.1,35.3)
T1_B: R1.2 T1.1 | length 2.4
  Top Layer w0.2: R1.2@22.738,76 22.738,73.912 T1.1@22.95,73.7
T1_C: J2.2 T1.3 | length 11.9
  Top Layer w1: J2.2@14,67 14,70.5 15,71.5 T1.3@22,71.5
T2_B: R3.2 T2.1 | length 1.9
  Top Layer w0.2: T2.1@24.5,61 24.5,62 24.688,62.188 R3.2@24.688,62.8
T2_C: J6.2 T2.3 | length 13.3
  Top Layer w1: J6.2@14,63 14,59.5 14.7,58.8 T2.3@23.55,58.8
T3_B: R4.2 T3.1 | length 2.4
  Top Layer w0.2: T3.1@26.55,73.7 26.738,73.888 R4.2@26.738,76
T3_C: J8.2 T3.3 | length 8.3
  Top Layer w1: J8.2@20.54,67 23.5,67 25.6,69.1 T3.3@25.6,71.5
T4_B: R5.2 T4.1 | length 1.9
  Top Layer w0.2: R5.2@29.688,69.3 29.688,68.7 30,68.388 T4.1@30,67.5
T4_C: J11.2 T4.3 | length 10.1
  Top Layer w1: J11.2@20.5,63 20.5,64 21.8,65.3 T4.3@29.05,65.3
UART0_RX: J9.3 uC1.67 | length 67
  Top Layer w0.2: uC1.67@57.95,45.6 57.95,44.05 v1(58.2,43.8)
  Signal Layer (VERT) w0.2: v1(58.2,43.8) 58.2,24.3 59.9,22.6 v1(59.9,17.1)
  Signal Layer 2 (HOR) w0.2: v1(59.9,17.1) 95.1,17.1 95.84,17.84 J9.3@95.84,19.3
UART0_TX: J9.2 uC1.66 | length 63.3
  Top Layer w0.2: uC1.66@57.45,45.6 57.45,42.95 v1(57.6,42.8)
  Signal Layer (VERT) w0.2: v1(57.6,42.8) 57.6,24.3 59.3,22.6 v1(59.3,18.1)
  Signal Layer 2 (HOR) w0.2: v1(59.3,18.1) 93,18.1 93.3,18.4 J9.2@93.3,19.3
UART4_RX: J3.3 uC1.119 | length 48
  Top Layer w0.2: uC1.119@55.5,66.85 v1(55.5,70.9)
  Signal Layer 2 (HOR) w0.2: v1(55.5,70.9) 77.7,70.9 78.788,69.812 93.154,69.812 93.166,69.8 95.3,69.8 96,69.1 J3.3@96,67 J3.3@96,66.4
UART4_TX: J3.2 uC1.120 | length 43.3
  Top Layer w0.2: v1(54.9,69.4) 54.95,69.35 uC1.120@54.95,66.8
  Signal Layer 2 (HOR) w0.2: v1(54.9,69.4) 54.912,69.412 92.988,69.412 93.46,68.94 J3.2@93.46,67
USB_D+: D1.4 J5.3 U1.4 | length 20.4
  Top Layer w0.2: J5.3@8.55,44.2 v1(10.2,44.2) ; D1.4@20.3,44.695 23.205,44.695 v1(23.35,44.55) 23.5,44.4 U1.4@23.5,42.25
  Signal Layer 2 (HOR) w0.2: v1(10.2,44.2) 23,44.2 v1(23.35,44.55)
USB_D-: D1.3 J5.2 U1.5 | length 16.2
  Top Layer w0.2: J5.2@8.55,45 16.2,45 16.505,44.695 D1.3@17.836,44.695 18.771,44.695 19.566,43.9 22.4,43.9 23,43.3 U1.5@23,42.25
USB_UC_RXD: U1.26 uC1.91 | length 51.5
  Top Layer w0.2: U1.26@25.75,40.5 27.8,40.5 28.1,40.8 v1(28.1,51.5) ; v1@60.35,56.45 uC1.91@62.3,56.45
  Signal Layer 2 (HOR) w0.2: v1(28.1,51.5) 29.3,51.5 29.5,51.7 59.4,51.7 60.2,52.5 v1(60.2,56.4)
USB_UC_TXD: U1.25 uC1.92 | length 52.5
  Top Layer w0.2: U1.25@25.75,40 25.805,40.055 27.921,40.055 28.7,40.834 v1(28.7,52.2) ; v1(59.1,56.3) 59.1,56.8 59.3,57 uC1.92@62.3,57
  Signal Layer 2 (HOR) w0.2: v1(28.7,52.2) 58.4,52.2 59.1,52.9 v1(59.1,56.3)
USB_VBUS: C4.1 C5.2 D1.1 J5.1 U1.7 U1.8 | length 22.6
  Top Layer w0.2: J5.1@8.55,45.8 10,45.8 10.2,46 10.2,46.4 10.4,46.6 11.3,46.6 11.5,46.8 ; C4.1@11.5,48.484 11.5,46.8 ; C5.2@14.5,48.484 14.5,46.8 ; v1(19.05,46.65) 19,46.6 D1.1@17.836,46.6 14.7,46.6 14.5,46.8 ; U1.8@21.25,41.5 v1(21.25,42.2) 21.3,42.25 U1.7@22,42.25 ; 11.5,46.8 11.7,46.6 14.3,46.6 14.5,46.8
  Signal Layer (VERT) w0.2: v1(19.05,46.65) 19.05,42.75 19.6,42.2 v1(21.25,42.2)
V_BAT: C23.1 C28.1 D10.A J2.1 J6.1 J8.1 J11.1 J23.1 J26.1 R33.2 U2.3 U4.1
  other v1: 10,61.5 12,61.5 16.5,61.5 18.5,61.5 10,64.5 12,64.5 16.5,65.5 18.5,65.5 10,68.5 12,68.5 16.5,68.5 18.5,68.5 10,70 12,70 16.5,70 17.5,70 18.5,70 13.5,83.5 19,84 9.5,86 15.5,86 17.5,86 19,86 9.5,87 11.5,87 14.5,87 9.5,88 11.5,88 14.5,88 9.5,89 14.5,89 9.5,90 14.5,90 9.5,91 14.5,91 9.5,92.5 14.5,92.5 9.5,93.5 14.5,93.5 9.5,94.5 14.5,94.5
V_BAT_DIV: C24.1 D11.2 R33.1 R35.1 uC1.83 | length 76.8
  Top Layer w0.2: D11.2@21.5,80.71 22.39,80.71 22.7,80.4 22.7,79.3 23,79 v1@66.4,79 ; uC1.83@62.3,52.45 66.166,52.45 v1(66.396,52.68)
  Bottom Layer w0.2: v1(66.396,52.68) 66.384,52.691 66.384,78.984 v1(66.45,79.05)
V_CURRENT_UC: C38.1 D21.2 R65.2 uC1.84 | length 62.4
  Top Layer w0.2: uC1.84@62.3,52.95 62.35,53 65.573,53 66.065,53.492 v1(69.342,53.492) ; v1(69.4,79.1) 83,79.1 83.464,79.564 83.464,87.833 83.088,88.21 D21.2@82.5,88.21 80.194,88.21 C38.1@80,88.016 80,90 80.738,90.738 R65.2@81,90.738
  Signal Layer (VERT) w0.2: v1(69.342,53.492) 69.4,53.55 v1(69.4,79.1)
VBEC_0: J27.2 J29.2
VBEC_1: J30.2 J32.2
VBEC_2: J33.2 J35.2
VBEC_3: J36.2 J38.2
pads on no net: D1.5 J5.4 J22.7 J22.9 J28.2 J31.2 J34.2 J37.2 MAG1.3 MAG1.5 MAG1.7 MAG1.14 MAG2.3 MAG2.5 MAG2.7 MAG2.14 MAG2.15 MPU1.2 MPU1.3 MPU1.4 MPU1.5 MPU1.14 MPU1.15 MPU1.16 MPU1.17 MPU1.19 MPU1.21 MPU1.22 MSC1.6 U1. U1.1 U1.2 U1.10 U1.11 U1.12 U1.13 U1.14 U1.15 U1.16 U1.17 U1.18 U1.19 U1.20 U1.21 U1.22 U1.23 U1.24 U1.27 U1.28 uC1.19 uC1.20 uC1.59 uC1.68 uC1.79 uC1.80 uC1.85 uC1.86 uC1.87 uC1.88 uC1.89 uC1.90 uC1.118 uC1.123 uC1.124 uC1.125 uC1.126 Y1.2 Y1.3
copper on no net: | length 0
  other v3: 6.3,42.45 6.3,45.95

## Polygon pours and split planes (outlines as drawn)
GND on Internal Plane (GND) (split plane): 99.49,0.6 99.461,0.594 99.428,0.572 99.406,0.539 99.4,0.51 0.51,0.51 0.51,99.49 99.49,99.49
3V3_A on Internal Plane (PWR) (split plane): 78.898,78.102 57,78.102 56.961,78.094 56.928,78.072 56.906,78.039 56.898,78 56.898,72.102 34.9,72.102 34.861,72.094 34.828,72.072 34.806,72.039 34.798,72 34.798,56.7 34.798,52.3 34.798,50.102 4.602,50.102 4.602,53 4.602,75.898 8.898,75.898 8.898,58 8.898,56 8.906,55.961 8.928,55.928 8.961,55.906 9,55.898 27,55.898 27.039,55.906 27.072,55.928 27.094,55.961 27.102,56 27.102,57 27.102,74.898 34,74.898 34.039,74.906 34.072,74.928 34.094,74.961 34.102,75 34.102,78.898 50,78.898 50.039,78.906 50.072,78.928 50.094,78.961 50.102,79 50.102,89.198 55,89.198 55.039,89.206 55.072,89.228 55.094,89.261 55.102,89.3 55.102,93.898 78.898,93.898
3V3 on Internal Plane (PWR) (split plane): 99.49,0.51 67.602,0.51 67.602,7.898 85,7.898 85.039,7.906 85.072,7.928 85.094,7.961 85.102,8 85.102,32 85.102,64 85.094,64.039 85.072,64.072 85.039,64.094 85,64.102 76,64.102 75.961,64.094 75.928,64.072 75.906,64.039 75.898,64 75.898,33 75.898,19.102 57,19.102 56.961,19.094 56.928,19.072 56.906,19.039 56.898,19 56.898,9.102 9.102,9.102 9.102,31.5 9.094,31.539 9.072,31.572 9.039,31.594 9,31.602 4.602,31.602 4.602,49.898 34.9,49.898 34.939,49.906 34.972,49.928 34.994,49.961 35.002,50 35.002,52.3 35.002,56.7 35.002,71.898 57,71.898 57.039,71.906 57.072,71.928 57.094,71.961 57.102,72 57.102,77.898 79,77.898 79.039,77.906 79.072,77.928 79.094,77.961 79.102,78 79.102,94 79.094,94.039 79.072,94.072 79.039,94.094 79,94.102 55,94.102 54.961,94.094 54.928,94.072 54.906,94.039 54.898,94 54.898,89.402 50,89.402 49.961,89.394 49.928,89.372 49.906,89.339 49.898,89.3 49.898,79.102 34,79.102 33.961,79.094 33.928,79.072 33.906,79.039 33.898,79 33.898,75.102 27,75.102 26.961,75.094 26.928,75.072 26.906,75.039 26.898,75 26.898,57 26.898,56.102 9.102,56.102 9.102,57.898 20,57.898 20.039,57.906 20.072,57.928 20.094,57.961 20.102,58 20.102,99.49 99.49,99.49
V_BAT on Internal Plane (PWR) (split plane): 19.898,58.102 9.102,58.102 9.102,85 9.094,85.039 9.072,85.072 9.039,85.094 9,85.102 3.5,85.102 3.461,85.094 3.428,85.072 3.406,85.039 3.398,85 3.398,81.102 0.51,81.102 0.51,99.49 19.898,99.49
5V on Internal Plane (PWR) (split plane): 8.898,76.102 4.5,76.102 4.461,76.094 4.428,76.072 4.406,76.039 4.398,76 4.398,53 4.398,50 4.398,31.5 4.406,31.461 4.428,31.428 4.461,31.406 4.5,31.398 8.898,31.398 8.898,9 8.906,8.961 8.928,8.928 8.961,8.906 9,8.898 57,8.898 57.039,8.906 57.072,8.928 57.094,8.961 57.102,9 57.102,18.898 76,18.898 76.039,18.906 76.072,18.928 76.094,18.961 76.102,19 76.102,33 76.102,63.898 84.898,63.898 84.898,32 84.898,8.102 67.5,8.102 67.461,8.094 67.428,8.072 67.406,8.039 67.398,8 67.398,0.51 0.51,0.51 0.51,80.898 3.5,80.898 3.539,80.906 3.572,80.928 3.594,80.961 3.602,81 3.602,84.898 8.898,84.898

## Other copper
Top Layer:
  rectangle net VBEC_0: 93,54.5 99,56.5
  rectangle net VBEC_1: 92.5,45.5 99,47.5
  rectangle net VBEC_2: 92.5,36.5 99,38.5
  rectangle net VBEC_3: 92.5,27.5 99,29.5
  rectangle net GND: 7.2,75.5 8.8,75.8
  rectangle net GND: 8.8,74 13.5,74.1
  rectangle net 5V: 13.7,73.5 14.5,74.3
  rectangle net 5V: 9,74.3 14.5,74.5
  rectangle net 5V: 14.5,73.5 17.5,74.5
  rectangle net 5V: 13.5,74.5 17.5,77
  rectangle net GND: 50.2,92.7 51.2,95.8
  rectangle net GND: 51.7,95.8 55,100
  rectangle net GND: 51.2,89.5 55,95.8
  rectangle net GND: 0,61.3 7.5,64.5
  rectangle net GND: 8.8,72 9,74
  rectangle net GND: 7.2,72 8.8,75.5
  rectangle net GND: 9,72 13.5,74
  rectangle net GND: 6.7,79.7 8.8,84.5
  rectangle net GND: 7.2,77.5 13.5,82.3
  rectangle net GND: 7.2,77.3 13.5,77.5
  rectangle net NetD10_C: 14.7,81.4 16.3,83.2
  rectangle net NetD10_C: 14.7,79.5 16.1,81.4
  rectangle net 3V3: 33.7,81.9 47,83.8
  rectangle net 3V3: 42,83.5 47,85.5
  rectangle net GND: 28.9,83.9 31.8,86.8
  rectangle net GND: 31.4,81.9 33.5,83.8
  rectangle net GND: 31.4,83.8 31.8,83.9
  rectangle net GND: 15.7,87.2 23.4,91.5
  rectangle net GND: 26.4,69 28.9,72.5
  rectangle net GND: 30.4,62 32,66
  rectangle net GND: 24.4,57.8 29.5,60
  rectangle net V_BAT: 15.7,59.5 19.3,70.8
  rectangle net V_BAT: 9.5,60.5 12.8,71.5
  rectangle net V_BAT: 8.5,91.5 15.5,99
  rectangle net GND: 15.7,91.5 20,99
  rectangle net GND: 18,76.5 22.2,77.9
  rectangle net GND: 3.1,89 5.5,91.5
  rectangle net GND: 0,86.7 3.1,91.5
  rectangle net GND: 21.5,67.7 22,70.5
  rectangle net GND: 21.3,67.7 21.5,70.5
  rectangle net 3V3_A: 7.5,65 9,70.5
  rectangle net 3V3_A: 7,70.5 9,71.5
  region net 5V: 6.5,84.5 6.5,79.5 7,79.5 7,76 0,76 0,80.8 3.5,80.8 3.5,84.5
  region net 5V: 0,76 0,73 4,73 4,76
  region net 3V3_A: 4.2,75.8 7,75.8 7,70.5 7.5,70.5 7.5,65 0,65 0,72.8 4.2,72.8
  region net V_BAT_DIV: 16.3,79.5 20.5,79.5 20.5,80 22.2,80 22.2,81.2 16.3,81.2
  region net V_BAT_DIV: 16.5,81.2 16.5,83.2 18.5,83.2 18.5,81.2
  region net NetD12_1: 23.2,79.3 23.2,84 23.6,84 23.6,92 32.5,92 32.5,99.7 38,99.7 38,84 32,84 32,87 25.3,87 25.3,84 25.3,79.3
  region net NetD12_1: 25.3,82.5 26.5,82.5 26.5,79.3 25.3,79.3
  region net V_BAT: 3.3,81 0,81 0,86.5 3.3,86.5 3.3,88.5 8.5,88.5 8.5,84.7 3.3,84.7
  region net V_BAT: 8.5,84.7 9,84.7 9,82.5 14.5,82.5 14.5,83.4 22.8,83.4 22.8,84.2 23.4,84.2 23.4,87 8.5,87
  region net V_BAT: 8.5,91.5 15.5,91.5 15.5,87 8.5,87
  region net 5V: 13.5,77 13.5,74.5 9,74.5 9,76 7,76 7,76.959 7,77
  region net GND: 14.7,79.3 20.7,79.3 20.7,79.8 22.2,79.8 22.2,77.9 14.7,77.9
  region net NetC25_2: 38,79.5 38,81.7 31.2,81.7 31.2,83.7 28.7,83.7 28.7,86.8 27.1,86.8 27.1,82.5 30.6,82.5 30.6,79.5
  region net 3V3: 40,82 47,82 47,89.5 51,89.5 51,92.5 50,92.5 50,96 51.5,96 51.5,100 40,100
  region net GND: 22.8,72.5 24.8,72.5 24.8,69.4 23.1,67.7 22.8,67.7
  region net GND: 22.8,67.7 22,67.7 22,70.5 22.8,70.5
Internal Plane (GND) (plane layer: these items are gaps in the copper):
  lines w0.2: 99.5,0.5 100,0 100,100 ; 0,0.5 0,0.5 ; 0,0.5 0,100 100,100 ; 100,100 100,100
Internal Plane (PWR) (plane layer: these items are gaps in the copper):
  lines w0.2: 9,76 4.5,76 4.5,53 4.5,50 ; 19.7,58 20,58 ; 67,0 100,0 ; 0,50 0,50 ; 0,50 0,81 ; 0,50 0,0 48,0 67.5,0 67.5,8 85,8 85,32 85,64 77,64 76,64 76,33 76,19 57,19 57,9 47,9 15,9 9,9 9,31.5 5,31.5 4.5,31.5 4.5,50 ; 0,81 0,85 0,100 19,100 20,100 ; 0,81 3.5,81 3.5,85 9,85 9,58 ; 4.5,50 34.9,50 34.9,52.3 34.9,56.7 34.9,72 37.8,72 54.8,72 57,72 57,78 79,78 79,94 55,94 55,89.3 50,89.3 50,79 38,79 34,79 34,75 27,75 27,57 27,56 9,56 9,58 ; 9,58 20,58 ; 20,58 20,100 ; 20,100 100,100 ; 100,0 100,0 ; 100,0 100,100 ; 100,100 100,100

## Silkscreen, mask and mechanical layers (free items; w line width, h text height)
Top Overlay:
  circle w0.254: c9.5,2 r0.707
  lines w0.2: 9,4 9.5,4.5 ; 10,4 9.5,4.5 ; 11.5,1.5 12,2 ; 11.5,2.5 12,2 ; 9.5,4.5 9.5,2 12,2
  text "+" at 8,98.5 h1
  text "-" at 20.8,98.5 h1 r90
  text "BAT" at 13.5,98 h1
  text "GND" at 83.5,98 h1
  text "ADC" at 83.5,95.5 h1
  text "(3V3_A)" at 83.5,93 h1
  text "MAX 20V" at 2,92.5 h1 r90
  text "10-20V" at 12.5,92 h1 r90
  text "GND" at 18,92 h1 r90
  text "GND" at 1.5,89.5 h1
  text "GND" at 16.5,86 h1
  text "3V3" at 50.5,86 h1 r90
  text "GND" at 53,86 h1 r90
  text "SPI0_2" at 84.5,85.5 h1
  text "VBAT" at 1,85 h1
  text "0" at 57,81 h1 r90
  text "3" at 61,81 h1 r90
  text "1" at 65,81 h1 r90
  text "4" at 69,81 h1 r90
  text "2" at 73,81 h1 r90
  text "5" at 77,81 h1 r90
  text "AMP" at 80.5,81 h1 r90
  text "4" at 45,79.5 h1 r90
  text "5" at 47.5,79.5 h1 r90
  text "6" at 50,79.5 h1 r90
  text "7" at 52.5,79.5 h1 r90
  text "GND" at 55,79 h1 r90
  text "SPI0_4" at 84.5,77.5 h1
  text "3V3" at 91,74 h1 r90
  text "SDA" at 94,74 h1 r90
  text "SCL" at 96.5,74 h1 r90
  text "GND" at 99,74 h1 r90
  text "0" at 35,73.5 h1 r90
  text "1" at 37.5,73.5 h1 r90
  text "2" at 40,73.5 h1 r90
  text "3" at 42.5,73.5 h1 r90
  text "5V" at 15,71.5 h1
  text "GND" at 18,71.5 h1
  text "3V3" at 32,71.5 h1 r90
  text "GPIO" at 33,71.5 h1
  text "I2C1" at 85.5,71 h1
  text "T1" at 13.5,69.5 h1
  text "T3" at 19.5,69.5 h1
  text "uC - K64" at 40,68 h1
  text "VBAT" at 23,66.5 h1
  text "UART4" at 81,66.5 h1
  text "Trans." at 23,65 h1
  text "3V3" at 88.5,63.5 h1
  text "TX" at 92,63.5 h1
  text "RX" at 94.5,63.5 h1
  text "GND" at 97,63.5 h1
  text "S0-3" at 95.5,62 h1
  text "M4-7" at 86,60.5 h1
  text "M0-3" at 91,60.5 h1
  text "M8-11" at 95.5,60.5 h1
  text "T2" at 13.5,59.5 h1
  text "T4" at 19.5,59.5 h1
  text "0-4-8" at 87.5,53.5 h1 r90
  text "1-5-9" at 87.5,44.5 h1 r90
  text "PRESSION" at 10.5,39 h1
  text "CP2102" at 26.5,38.5 h1
  text "RESET" at 60.5,35 h1
  text "2-6-10" at 87.5,35 h1 r90
  text "I2C0" at 0.5,32 h1
  text "PROG" at 70.5,30 h1
  text "3-7-11" at 87.5,26 h1 r90
  text "MPU" at 29.5,24.5 h1
  text "3V3" at 89,22 h1
  text "TX" at 94,22 h1 r90
  text "RX" at 96,22 h1 r90
  text "GND" at 97,22 h1
  text "4" at 5.5,20.5 h1 r90
  text "MAG" at 59,20.5 h1
  text "MAG" at 48,19.5 h1
  text "UART0" at 95,16 h1
  text "EM7180" at 17.5,15 h1
  text "GND" at 83,13.5 h1
  text "7" at 18,12.5 h1
  text "6" at 21.5,12.5 h1
  text "5" at 26,12.5 h1
  text "4" at 30,12.5 h1
  text "0" at 33.5,12.5 h1
  text "1" at 38,12.5 h1
  text "2" at 41.5,12.5 h1
  text "3" at 45.5,12.5 h1
  text "SIN" at 83,11 h1
  text "SPI0_1" at 73,10 h1 r90
  text "General purpose switches" at 16,9.5 h1 r90
  text "SPI0_0" at 92,9.5 h1 r90
  text "0" at 5.5,9 h1 r90
  text "SOUT" at 82.5,8.5 h1
  text "7" at 49.5,8 h1
  text "6" at 51,8 h1
  text "5" at 53,8 h1
  text "4" at 55,8 h1
  text "3" at 57.5,8 h1
  text "2" at 59.5,8 h1
  text "1" at 61.5,8 h1
  text "0" at 63.5,8 h1
  text "OFF" at 11.5,6.5 h1 r90
  text "SCK" at 83,6 h1
  text "Y" at 10.5,4 h1
  text "CS" at 84,3.5 h1
  text "LEDS" at 66,1.5 h1 r90
  text "Z" at 7.5,1 h1
  text "X" at 12.5,1 h1
  text "PWM IN" at 15.5,1 h1 r90
  text "22.06.15" at 76.5,1 h1 r90
  text "Aeroval v1.0" at 78,1 h1 r90
  text "Valentin Py" at 79.5,1 h1 r90
  text "HE-Arc" at 81,1 h1 r90
  text "3V3" at 83,1 h1
Mechanical 1:
  the board outline again, w0.2

## Text inside footprints (layer, text, board x,y; h text height)
J21: Top Overlay "P1" at 6.58,62.328 h0.76 r270; Top Overlay "P8" at 6.565,52.236 h0.76 r270
SW1: Top Overlay "1" at 11.55,10.465 h1 r90; Top Overlay "ON" at 8.205,7.6 h1 r90; Top Overlay "2" at 11.55,13.005 h1 r90; Top Overlay "3" at 11.55,15.545 h1 r90; Top Overlay "4" at 11.55,18.085 h1 r90
SW2: Top Overlay "1" at 11.55,22.085 h1 r90; Top Overlay "ON" at 8,22 h1 r90; Top Overlay "2" at 11.55,24.625 h1 r90; Top Overlay "3" at 11.55,27.165 h1 r90; Top Overlay "4" at 11.55,29.705 h1 r90